# Altium PCB INTERPLACA FINAL.PcbDoc
Units mm, origin at the board's own origin, x right, y up, seen from the top; angles counter-clockwise.
Board outline 58.7 x 31.29 mm, 2 copper layers (Top Layer, Bottom Layer); 7 components, 13 nets, 37 pads, 12 vias.
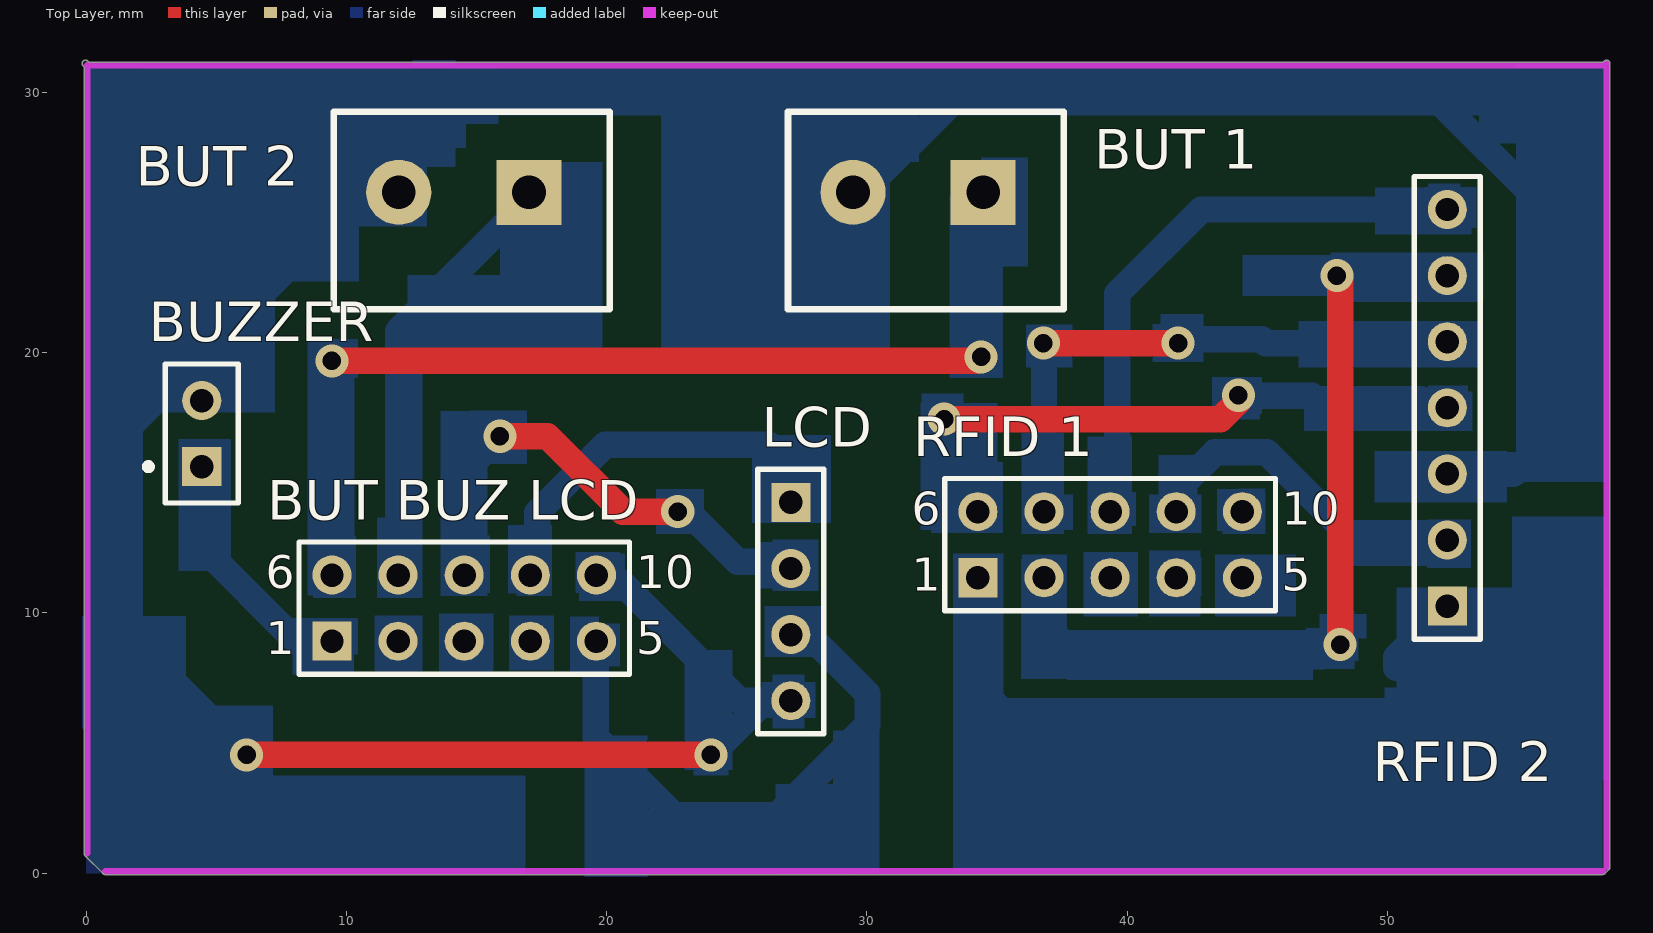
[diagram p0: Top Layer view]
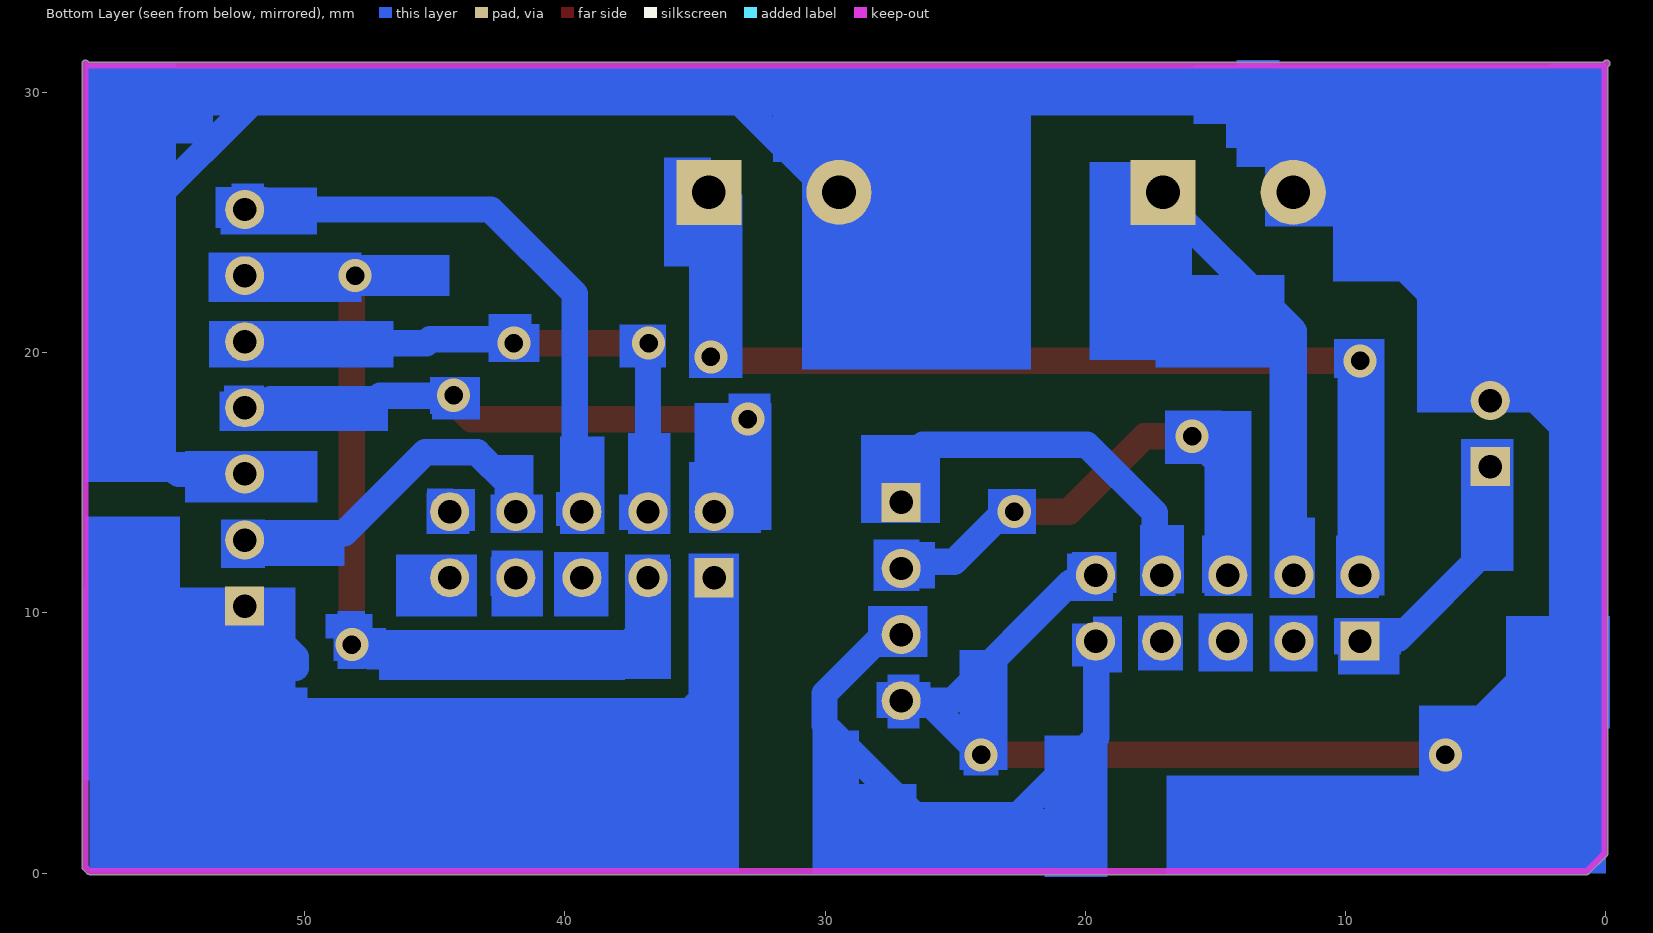
[diagram p1: Bottom Layer view, seen from below]

## Layer stack, top to bottom
Top Solder: solder mask 0.0102, Solder Resist, Dk 3.5
Top Layer: signal copper 0.0356
Dielectric 1: dielectric 0.32, FR-4, Dk 4.8
Bottom Layer: signal copper 0.0356
Bottom Solder: solder mask 0.0102, Solder Resist, Dk 3.5

## Board outline
-0.075,0.762 -0.075,30.987 -0.114,31.026 cw(c-0.025,31.115) 0.063,31.204 0.103,31.164 58.292,31.164 58.331,31.204 58.331,31.203 cw(c58.42,31.115) 58.545,31.115 58.545,0.229 cw(c58.42,0.229) 58.508,0.14 58.509,0.14 58.356,-0.012 58.357,-0.012 cw(c58.268,0.076) 58.268,-0.049 0.737,-0.049 cw(c0.737,0.076) 0.648,-0.012 -0.038,0.673 cw(c0.051,0.762)

## Design rules (kind name [scope] priority, off if disabled: settings)
Clearance [All] p1: gap=1.016 ignorepadtopadclearanceinfootprint=FALSE
PolygonConnect [All] p1: connectstyle=Relief reliefconductorwidth=0.254 reliefentries=4 polygonreliefangle="90 Angle" airgapwidth=0.254
RoomDefinition INTERPLACA [InComponentClass('INTERPLACA')] p1: confinementstyle=ConfineIn formatcopy=TRUE lockcomponents=FALSE outline -25.425,-95.961 25.375,-95.961 25.375,-70.561 -25.425,-70.561
RoutingVias [All] p1: holewidth=0.711 width=1.27 viastyle="Through Hole" minholewidth=0.711 minwidth=1.27 maxholewidth=0.711 maxwidth=1.27
SolderMaskExpansion [All] p1: expansion=0.102
Width [All] p1: maxlimit=1.016 minlimit=1.016 preferedwidth=1.016
30 further rules are at their usual default settings.

## Components (designator, comment, footprint, x,y, rotation, side; value= is the part's Value field where it differs from the comment)
"BUT 1" "Header 2" "BORNERA 2 pin" 37.568,21.662 r180 top
"BUT 2" "Header 2" "BORNERA 2 pin" 20.114,21.662 r180 top
"BUT BUZ LCD" "Header 5X2A" HDR2X5_CEN 9.449,8.915 r0 top
BUZZER "Bell" PIN2 4.445,15.621 r90 top
LCD "Header 4" HDR1X4 27.076,14.249 r270 top
"RFID 1" "Header 5X2A" HDR2X5_CEN 34.265,11.354 r0 top
"RFID 2" "Header 7" HDR1X7 52.299,10.262 r90 top

## Footprints (in the part's own frame and the unit in brackets; to place one, negate y for a bottom-side part, rotate by r counter-clockwise, add the part's x,y. Pads: shape width x height; smd on the part's side, far side on the other; paste and mask are expansions set on the pad)
"BORNERA 2 pin" [mm]
  rect 2.5x2.5 hole 1.3: 1(3.1,-4.5)
  round 2.5 hole 1.3: 2(8.1,-4.5)
  silkscreen extent 0,-7.6 10.6,0
HDR1X4 [mm] "Connector; Header; 4 Position"
  rect 1.5x1.5 hole 0.9: 1(0,0)
  round 1.5 hole 0.9: 2(2.54,0) 3(5.08,0) 4(7.62,0)
  silkscreen extent -1.27,-1.27 8.89,1.27
HDR1X7 [mm] "Connector; Header; 7 Position"
  rect 1.5x1.5 hole 0.9: 1(0,0)
  round 1.5 hole 0.9: 2(2.54,0) 3(5.08,0) 4(7.62,0) 5(10.16,0) 6(12.7,0) 7(15.24,0)
  silkscreen extent -1.27,-1.27 16.51,1.27
HDR2X5_CEN [mm] "Connector; Header; 5x2 Position"
  rect 1.5x1.5 hole 0.9: 1(0,0)
  round 1.5 hole 0.9: 2(2.54,0) 3(5.08,0) 4(7.62,0) 5(10.16,0) 6(0,2.54) 7(2.54,2.54) 8(5.08,2.54) 9(7.62,2.54) 10(10.16,2.54)
  silkscreen extent -1.27,-1.27 11.43,3.81
PIN2 [mm] "Photosensitive Diode; 2 Leads"
  rect 1.5x1.5 hole 0.9: 1(0,0)
  round 1.5 hole 0.9: 2(2.54,0)
  silkscreen extent -1.4,-1.4 3.94,2.17

## Part data
"BUT 1" "BUT 2": "Header, 2-Pin", LatestRevisionDate=17-Jul-2002, LatestRevisionNote="Re-released for DXP Platform.", Publisher="Altium Limited"
"BUT BUZ LCD" "RFID 1": "Header, 5-Pin, Dual row", LatestRevisionDate=17-Jul-2002, LatestRevisionNote="Re-released for DXP Platform.", Publisher="Altium Limited"
BUZZER: "Electrical Bell", LatestRevisionDate=17-Jul-2002, LatestRevisionNote="Re-released for DXP Platform.", PackageReference=PIN2, Published=24-Mar-1999, Publisher="Altium Limited"
LCD: "Header, 4-Pin", LatestRevisionDate=17-Jul-2002, LatestRevisionNote="Re-released for DXP Platform.", Publisher="Altium Limited"
"RFID 2": "Header, 7-Pin", LatestRevisionDate=17-Jul-2002, LatestRevisionNote="Re-released for DXP Platform.", Publisher="Altium Limited"

## Via types
v1: diameter 1.27, hole 0.711, Top Layer to Bottom Layer, 12 vias

## Nets (pads, with @x,y where several pads share a name; then routed paths per layer and width w, separated by ;. In a path a pad name is that pad's centre, name@x,y a point inside that pad or via, vN(x,y) a via of type N, cw(c..) or ccw(c..) an arc to the next point about the centre after c; other vN are vias at no path point)
GND: "BUT 1.2" "BUT 2.2" "BUT BUZ LCD.10" "RFID 2.3" BUZZER.2 LCD.4 | length 119.6
  Top Layer w1.016: v1(6.172,4.547) v1(24.003,4.547)
  Bottom Layer w1.016: BUZZER.2 3.632,18.974 3.479,18.974 ; v1(6.172,4.547) 1.422,9.296 1.422,16.917 3.479,18.974 ; 12.014,25.857 10.362,25.857 3.479,18.974 ; 15.85,29.693 33.35,29.693 ; 19.609,11.455 19.875,11.189 20.551,11.189 25.111,6.629 26.086,6.629 v1(24.003,4.547) ; 29.468,26.162 29.82,26.162 33.35,29.693 ; 52.299,15.342 54.839,15.342 55.931,16.434 55.931,25.705 51.943,29.693 33.35,29.693
"Net BUT BUZ LCD_1": "BUT BUZ LCD.1" BUZZER.1 | length 9.6
  Bottom Layer w1.016: BUZZER.1 4.445,12.548 7.976,9.017 9.347,9.017 9.449,8.915
"Net BUT BUZ LCD_5": "BUT BUZ LCD.5" LCD.3 | length 21.9
  Bottom Layer w1.016: 19.609,8.915 19.583,8.89 19.583,5.232 22.581,2.235 26.568,2.235 30.023,5.69 30.023,6.899 28.018,8.903 27.342,8.903 LCD.3
"Net BUT BUZ LCD_8": "BUT BUZ LCD.8" LCD.2 | length 19.2
  Top Layer w1.016: v1(15.9,16.789) 17.729,16.789 20.625,13.894 v1(22.733,13.894)
  Bottom Layer w1.016: 14.529,11.455 14.529,15.418 v1(15.9,16.789) ; v1(22.733,13.894) 23.113,13.894 25.031,11.975 26.81,11.975 LCD.2
"Net BUT BUZ LCD_9": "BUT BUZ LCD.9" LCD.1 | length 15
  Bottom Layer w1.016: 17.069,11.455 17.335,11.721 17.335,13.855 19.939,16.459 26.238,16.459 27.076,15.621 LCD.1
"NetBUT 1_1": "BUT 1.1" "BUT BUZ LCD.6" | length 39.6
  Top Layer w1.016: v1(9.449,19.685) 34.239,19.685 v1(34.392,19.837)
  Bottom Layer w1.016: 9.449,11.455 v1(9.449,19.685) ; v1(34.392,19.837) 34.392,26.086 34.468,26.162
"NetBUT 2_1": "BUT 2.1" "BUT BUZ LCD.7" | length 16.5
  Bottom Layer w1.016: 11.989,11.455 11.989,20.832 17.014,25.857
"NetRFID 1_1": "RFID 1.1" "RFID 2.1" | length 21.8
  Bottom Layer w1.016: 34.265,11.354 34.48,11.139 34.48,6.948 35.789,5.639 48.087,5.639 ; 50.343,7.894 50.343,8.306 52.299,10.262
"NetRFID 1_2": "RFID 1.2" "RFID 2.6" | length 32.5
  Top Layer w1.016: v1(48.057,22.962) 48.133,22.962 48.184,22.911 v1(48.184,8.788)
  Bottom Layer w1.016: 36.805,11.354 37.071,11.088 37.071,9.309 38.048,8.331 47.495,8.331 48.068,8.904 v1(48.184,8.788) ; v1(48.057,22.962) 52.299,22.962
"NetRFID 1_6": "RFID 1.6" "RFID 2.4" | length 24.3
  Top Layer w1.016: v1(32.969,17.45) 43.586,17.45 44.272,18.136 v1(44.272,18.364)
  Bottom Layer w1.016: v1(32.969,17.45) 34.265,16.154 34.265,13.894 ; v1(44.272,18.364) 44.221,18.415 44.401,18.415 44.477,18.339 47.092,18.339 47.219,18.212 51.292,18.212 51.292,18.148 52.033,18.148 52.299,17.882
"NetRFID 1_7": "RFID 1.7" "RFID 2.5" | length 22.2
  Top Layer w1.016: v1(36.779,20.371) v1(41.961,20.371)
  Bottom Layer w1.016: v1(36.779,20.371) 36.805,20.345 36.805,13.894 ; v1(41.961,20.371) 42.113,20.523 45.166,20.523 45.319,20.371 52.248,20.371 52.299,20.422
"NetRFID 1_8": "RFID 1.8" "RFID 2.7" | length 22.5
  Bottom Layer w1.016: 39.345,13.894 39.611,14.16 39.611,22.262 42.85,25.502 52.299,25.502
"NetRFID 1_9": "RFID 1.9" "RFID 2.2" | length 13.4
  Bottom Layer w1.016: 41.885,13.894 42.151,13.894 42.151,14.947 43.371,16.168 45.367,16.168 48.467,13.068 52.033,13.068 52.299,12.802
pads on no net: "BUT BUZ LCD.2" "BUT BUZ LCD.3" "BUT BUZ LCD.4" "RFID 1.3" "RFID 1.4" "RFID 1.5" "RFID 1.10"

## Keep-outs
Bottom Layer:
  lines w0.25: -0.025,31.115 0.051,31.039 ; 0.051,0.762 0.222,0.591 0.565,0.248 0.737,0.076 ; 58.268,0.076 58.42,0.229 ; 58.344,31.039 58.42,31.115
Keep-Out Layer:
  lines w0.25: 0.051,0.762 0.051,31.039 58.344,31.039 ; 0.737,0.076 58.268,0.076 ; 58.42,0.229 58.42,31.115

## Other copper
Bottom Layer:
  rectangle net "NetRFID 1_8": 51.435,24.79 53.416,26.365
  rectangle net "NetRFID 1_1": 54.788,9.754 58.42,13.716
  rectangle net GND: 6.02,-0.076 16.891,3.759
  rectangle net "NetRFID 1_7": 36.119,19.431 37.897,21.082
  rectangle net "NetRFID 1_2": 44.425,22.174 48.946,23.749
  rectangle net "NetRFID 1_6": 43.612,17.653 45.187,19.075
  rectangle net "NetRFID 1_7": 41.275,19.634 42.926,21.488
  rectangle net "NetRFID 1_2": 35.916,8.915 37.363,12.065
  rectangle: 38.506,10.439 40.31,12.065
  rectangle: 40.919,10.643 42.85,12.141
  rectangle: 43.663,10.566 45.517,12.065
  rectangle: 43.663,13.03 45.314,14.63
  rectangle net "NetRFID 1_9": 41.199,13.106 42.697,14.757
  rectangle net "NetRFID 1_8": 38.583,13.233 40.157,14.834
  rectangle net "NetRFID 1_7": 36.119,13.183 37.567,15.164
  rectangle net "NetRFID 1_6": 32.055,13.183 35.027,18.059
  rectangle net "NetBUT 1_1": 33.172,19.025 35.23,26.086
  rectangle net GND: 29.515,27.33 32.004,30.201
  rectangle net GND: 22.098,19.355 30.886,29.591
  rectangle net "NetBUT 2_1": 15.9,19.71 19.837,27.33
  rectangle net "NetBUT 2_1": 12.344,19.431 17.297,22.987
  rectangle net "NetBUT 1_1": 8.509,19.025 10.439,20.523
  rectangle net "Net BUT BUZ LCD_8": 14.757,15.723 16.942,17.78
  rectangle net "Net BUT BUZ LCD_8": 21.895,13.03 23.749,14.757
  rectangle net "Net BUT BUZ LCD_8": 26.365,10.846 28.143,12.827
  rectangle net "Net BUT BUZ LCD_5": 26.086,8.306 28.346,9.957
  rectangle net GND: 25.959,5.969 28.016,7.341
  rectangle net GND: 22.987,3.962 24.841,8.585
  rectangle net "Net BUT BUZ LCD_5": 18.796,7.95 20.523,9.601
  rectangle: 16.256,8.103 17.907,9.601
  rectangle: 13.665,8.153 15.519,9.881
  rectangle: 11.176,7.95 12.827,9.754
  rectangle net GND: 18.796,10.77 20.523,12.344
  rectangle net "Net BUT BUZ LCD_9": 16.535,10.643 17.907,13.386
  rectangle net "Net BUT BUZ LCD_8": 13.868,10.77 15.519,12.979
  rectangle net "NetBUT 2_1": 11.176,10.566 12.7,13.665
  rectangle net "NetBUT 1_1": 8.712,10.566 10.363,12.979
  rectangle net "Net BUT BUZ LCD_1": 3.556,11.608 5.563,16.688
  rectangle net GND: 6.248,22.733 10.49,26.492
  rectangle net GND: 1.499,17.704 7.264,26.924
  rectangle net GND: 13.437,27.864 14.605,29.591
  rectangle net GND: 14.072,28.778 15.85,31.039
  rectangle net GND: 12.548,27.127 14.199,31.242
  rectangle net GND: 0.051,24.841 13.106,31.039
  rectangle net GND: -0.025,8.992 2.184,31.115
  rectangle net GND: -0.152,5.563 3.835,9.881
  rectangle net GND: 0,0 7.188,6.452
  rectangle net "Net BUT BUZ LCD_5": 20.65,0 27.661,2.464
  rectangle net "Net BUT BUZ LCD_5": 19.152,-0.152 21.565,5.283
  rectangle net "Net BUT BUZ LCD_5": 26.492,-0.076 29.388,3.429
  rectangle net "Net BUT BUZ LCD_5": 28.702,0 30.48,5.486
  rectangle net "NetRFID 1_9": 51.511,11.735 53.213,13.589
  rectangle net GND: 51.435,14.402 53.213,16.205
  rectangle net "NetRFID 1_6": 51.562,17.094 53.086,18.745
  rectangle net "NetRFID 1_7": 51.435,19.634 53.213,21.133
  rectangle net "NetRFID 1_2": 51.765,22.047 53.365,23.673
  rectangle net "NetRFID 1_8": 51.562,24.917 52.807,26.492
  rectangle net GND: 53.518,28.042 55.677,29.515
  rectangle net GND: 15.24,29.108 57.607,30.963
  rectangle net GND: 54.94,15.037 58.42,31.115
  rectangle net "NetRFID 1_1": 50.343,3.556 58.496,10.973
  rectangle net "NetRFID 1_1": 33.299,0.076 58.268,6.731
  rectangle net "NetRFID 1_1": 33.299,6.731 35.255,12.294
  rectangle net "NetRFID 1_6": 32.461,13.081 35.23,15.799
  rectangle net "NetRFID 1_7": 35.941,13.03 37.567,16.916
  rectangle net "NetRFID 1_8": 38.481,13.03 40.183,16.789
  rectangle net "NetRFID 1_9": 41.199,13.106 42.647,16.078
  rectangle net "NetRFID 1_9": 40.843,13.081 42.85,14.554
  rectangle: 43.459,13.157 44.552,14.757
  rectangle: 43.383,9.855 46.482,12.243
  rectangle: 40.843,9.855 42.824,12.395
  rectangle: 38.329,9.855 40.411,12.344
  rectangle net "NetRFID 1_2": 35.966,7.925 37.694,12.243
  rectangle net "NetRFID 1_2": 35.916,7.925 37.694,8.915
  rectangle net "NetRFID 1_2": 37.694,7.417 47.142,9.347
  rectangle net "NetRFID 1_2": 35.916,7.468 38.913,8.204
  rectangle net "NetRFID 1_7": 36.119,13.183 37.922,14.554
  rectangle net "NetRFID 1_8": 39.065,13.335 40.335,14.656
  rectangle: 44.272,13.995 45.288,14.783
  rectangle net "NetRFID 1_9": 50.775,11.811 52.045,13.36
  rectangle net "NetRFID 1_9": 48.467,11.811 52.045,13.068
  rectangle net GND: 49.505,14.249 54.585,16.231
  rectangle net GND: 53.95,15.723 55.448,16.18
  rectangle net "NetRFID 1_6": 46.787,16.993 53.264,18.517
  rectangle net "NetRFID 1_7": 46.584,19.431 53.67,21.209
  rectangle net "NetRFID 1_2": 47.803,21.946 53.696,23.851
  rectangle net "NetRFID 1_8": 49.53,24.536 53.238,26.34
  rectangle net "NetRFID 1_7": 40.97,19.634 42.926,21.107
  rectangle net "NetRFID 1_6": 43.256,17.424 45.11,19.075
  rectangle net "NetRFID 1_6": 32.106,16.84 33.706,18.44
  rectangle net "NetRFID 1_2": 46.863,8.153 48.895,9.423
  rectangle net "NetRFID 1_2": 47.676,7.849 47.752,7.899
  rectangle net "NetRFID 1_2": 47.676,7.849 48.743,10.084
  rectangle net "NetRFID 1_2": 47.396,9.017 49.2,9.957
  rectangle net "NetRFID 1_1": 49.886,6.299 51.003,7.137
  rectangle net "Net BUT BUZ LCD_9": 25.578,13.462 28.626,16.84
  rectangle net "Net BUT BUZ LCD_8": 25.781,10.947 27.534,12.725
  rectangle net "Net BUT BUZ LCD_5": 26.06,8.306 28.346,10.262
  rectangle net GND: 26.365,5.563 27.61,7.645
  rectangle net GND: 23.343,3.759 24.689,5.385
  rectangle net "Net BUT BUZ LCD_1": 7.874,8.407 10.439,9.804
  rectangle net "Net BUT BUZ LCD_1": 8.611,7.645 10.287,9.754
  rectangle net "Net BUT BUZ LCD_1": 7.925,7.645 10.287,9.601
  rectangle: 11.074,7.747 12.929,9.906
  rectangle: 13.564,7.747 15.646,9.982
  rectangle: 16.256,7.798 17.983,9.906
  rectangle net "Net BUT BUZ LCD_5": 18.593,7.722 19.71,9.855
  rectangle net GND: 18.948,10.465 20.701,12.294
  rectangle net "Net BUT BUZ LCD_9": 16.205,10.744 17.907,13.386
  rectangle net "Net BUT BUZ LCD_8": 13.614,10.643 15.418,17.755
  rectangle net "NetBUT 2_1": 11.862,10.566 12.929,19.558
  rectangle net "NetBUT 1_1": 8.509,10.668 10.312,20.142
  rectangle net "NetBUT 1_1": 34.392,23.317 36.195,27.508

## Text inside footprints (layer, text, board x,y; h text height)
"BUT BUZ LCD": Top Overlay "6" at 6.909,10.947 h1.27; Top Overlay "10" at 21.133,10.947 h1.27; Top Overlay "5" at 21.133,8.407 h1.27; Top Overlay "1" at 6.909,8.407 h1.27
"RFID 1": Top Overlay "6" at 31.725,13.386 h1.27; Top Overlay "10" at 45.949,13.386 h1.27; Top Overlay "5" at 45.949,10.846 h1.27; Top Overlay "1" at 31.725,10.846 h1.27